# Altium PCB mcb.PcbDoc (part 2 of 2)
Units mil, origin at the board's own origin, x right, y up, seen from the top; angles counter-clockwise.
Board outline 4133.86 x 3543.31 mil, 2 copper layers (Top Layer, Bottom Layer); 79 components, 88 nets, 392 pads, 91 vias.
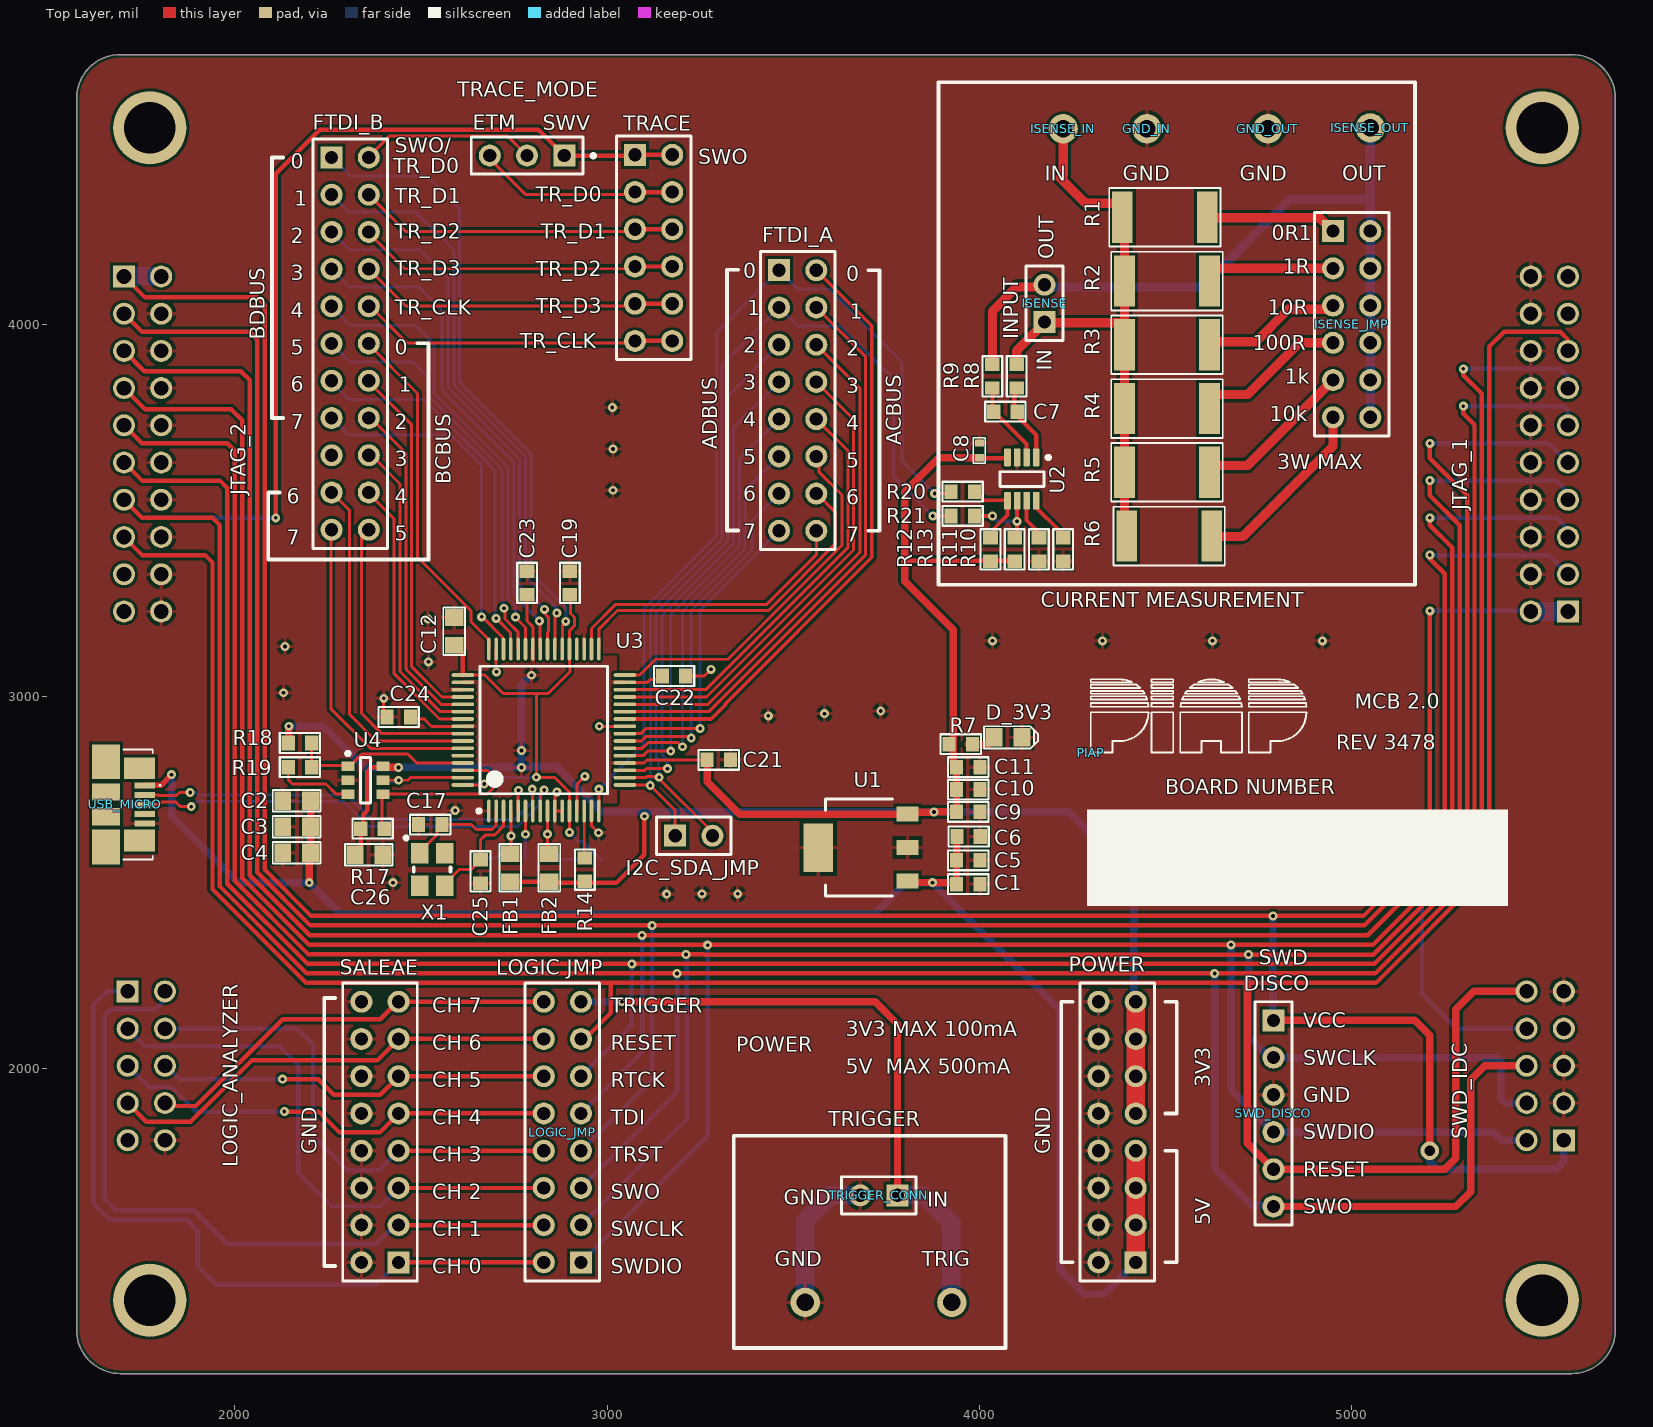
[diagram p0: Top Layer view]

## Silkscreen, mask and mechanical layers (free items; w line width, h text height) (continued)
Top Overlay: (continued)
  text "GND" at 3475,1635 h40
  text "IN" at 3860,1630 h40
  text "SWO" at 4870,1610 h40
  text "5V" at 4620,1580 h40 r90
  text "CH 1" at 2530,1550 h40
  text "SWCLK" at 3010,1550 h40
  text "CH 0" at 2530,1450 h40
  text "SWDIO" at 3010,1450 h40

## Dimensions
1574.8,1299.21 to 5708.66,1299.21 on Mechanical 13
1771.65,1377.95 to 5511.81,1377.95 on Mechanical 13
5511.81,4527.56 to 5511.81,1377.95 on Mechanical 13
5590.55,4724.41 to 5590.55,1181.1 on Mechanical 13

## Text inside footprints (layer, text, board x,y; h text height)
USB_MICRO: Mechanical 4 "PCB EDGE" at 1570.74,2942.83 h40 r270; Mechanical 4 "PCB EDGE" at 1570.74,2942.83 h40 r270